# Altium PCB CIU.PcbDoc (part 1 of 2)
Units mil, origin at the board's own origin, x right, y up, seen from the top; angles counter-clockwise.
Board outline 2900 x 1900 mil, 4 copper layers (Layer 1 Signal Power, Layer 2 GND, Layer 3 GND, Layer 4 Signal), stack 23.756 mil thick; 120 components, 69 nets, 401 pads, 201 vias.
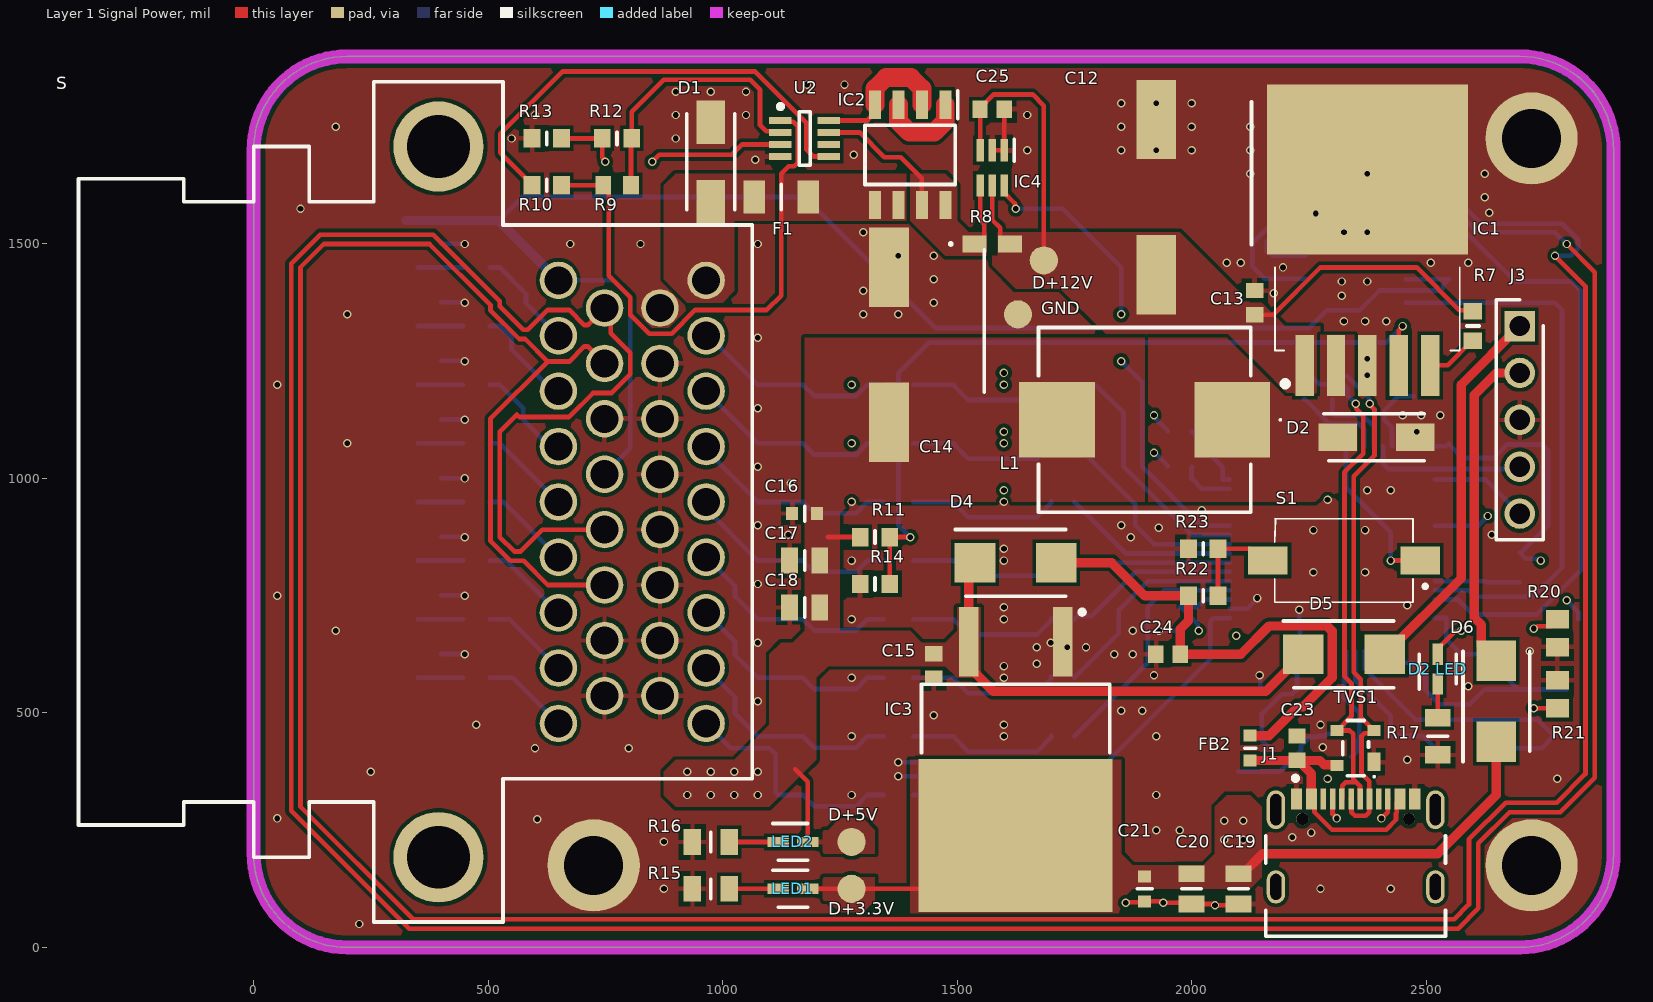
[diagram p0: Layer 1 Signal Power view]
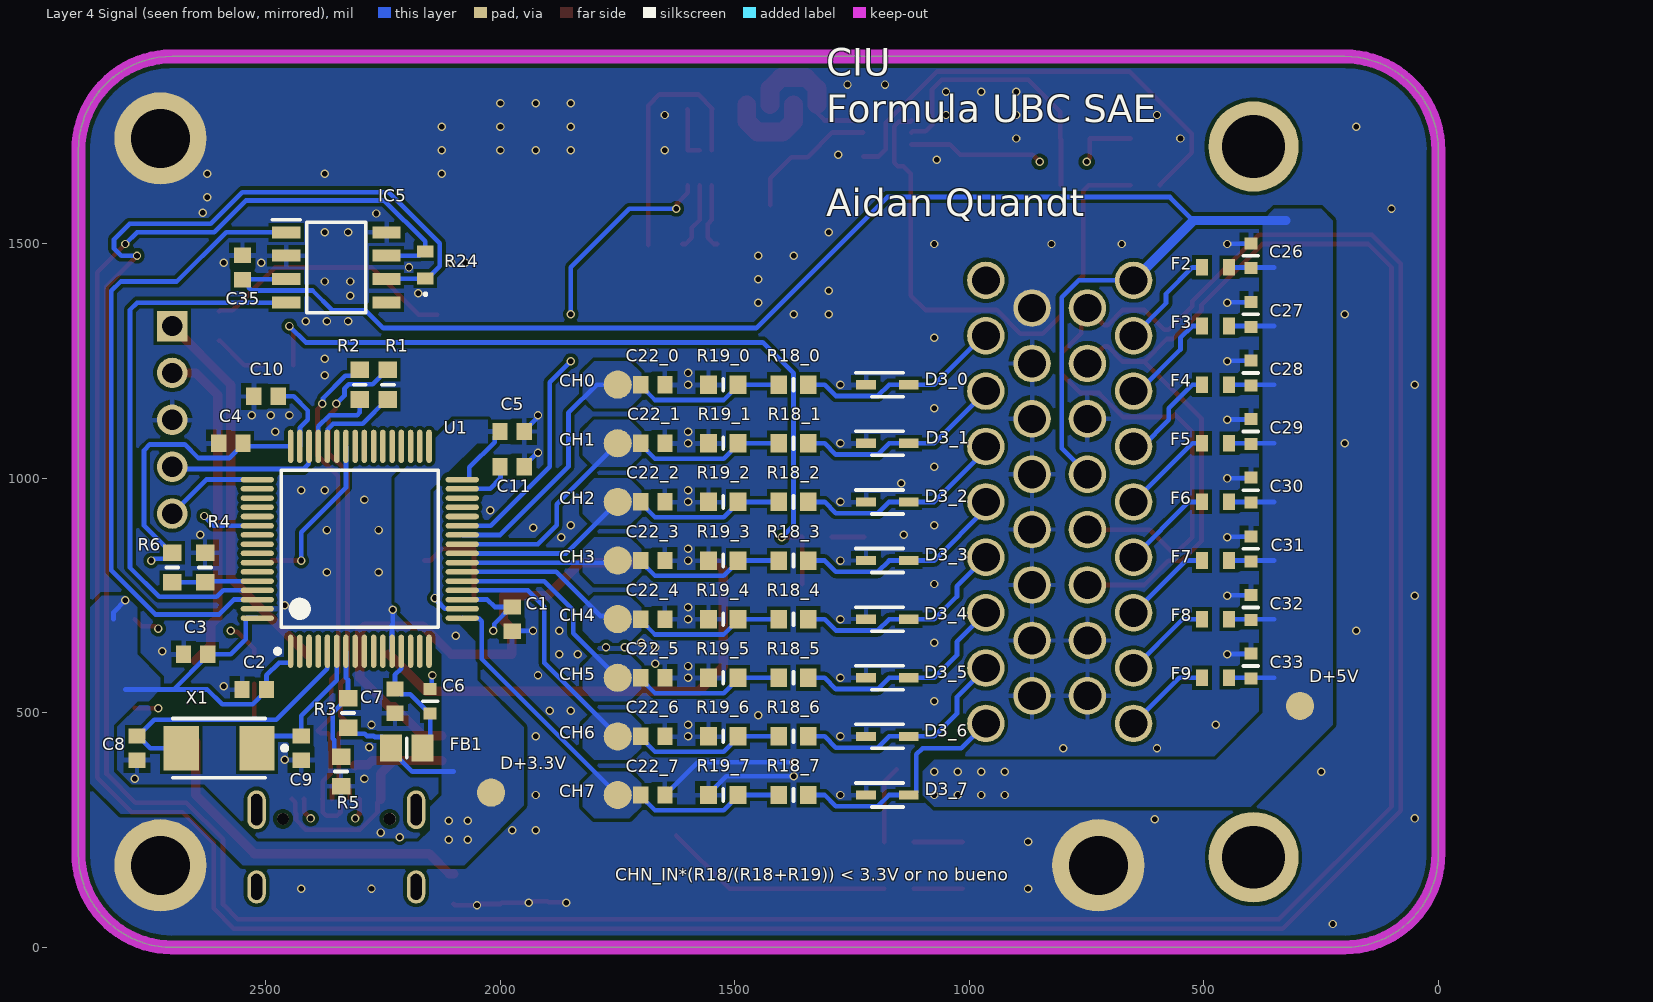
[diagram p1: Layer 4 Signal view, seen from below]
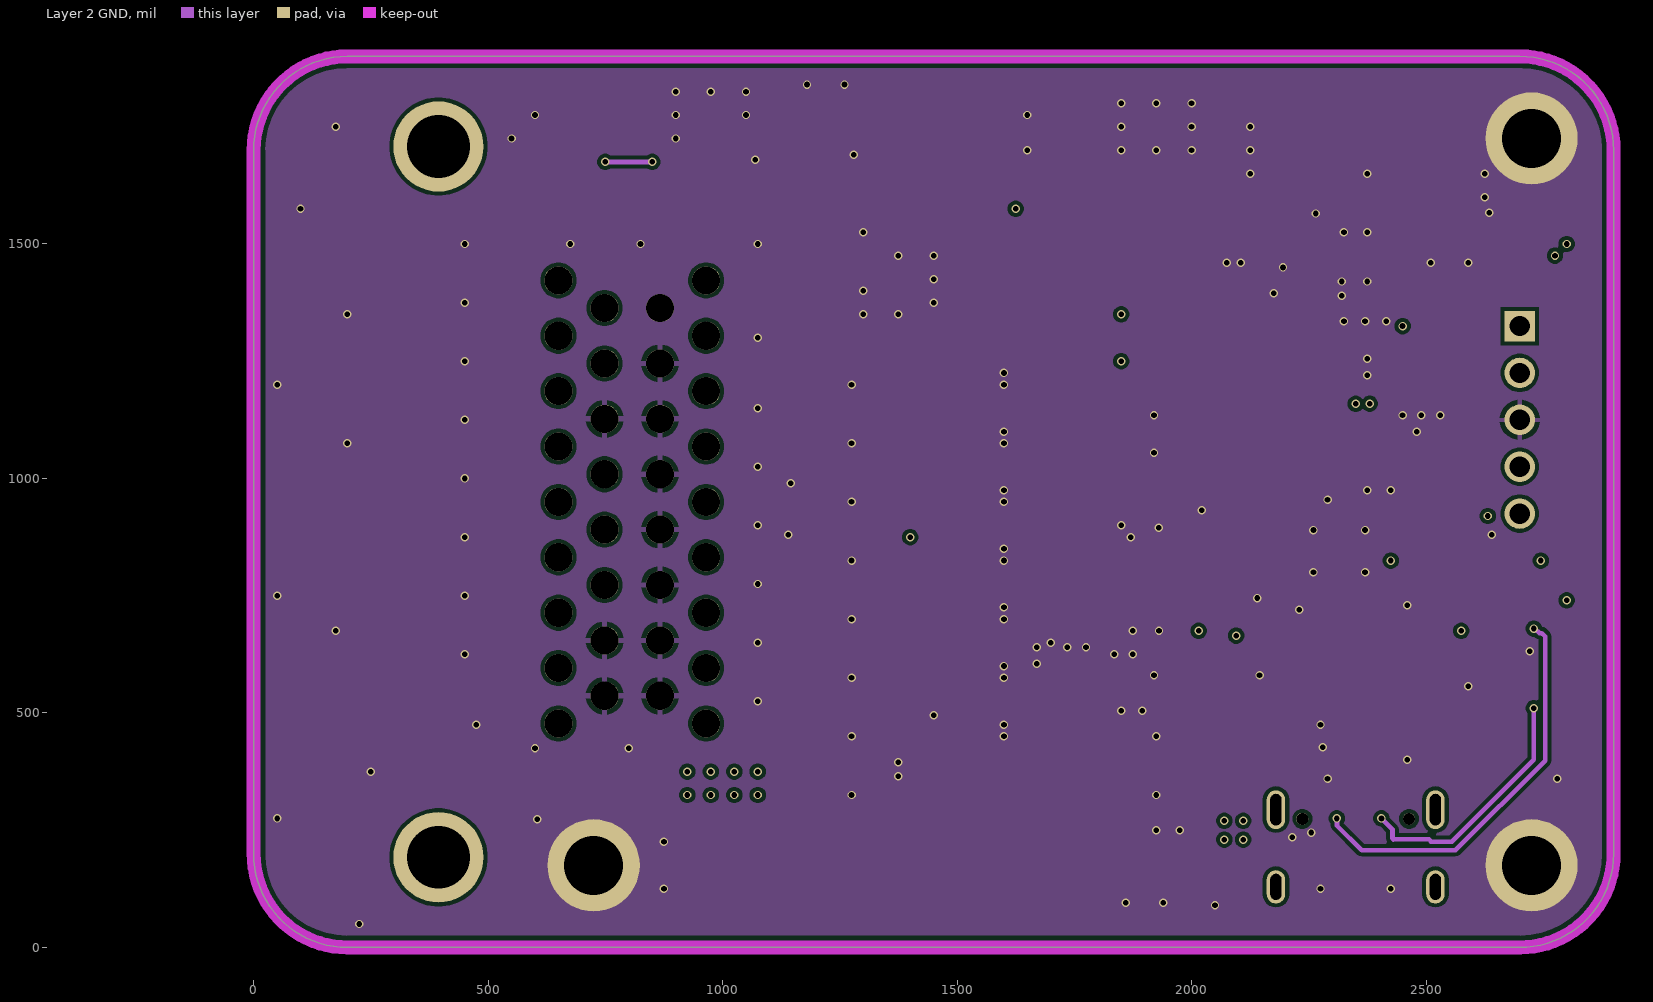
[diagram p2: Layer 2 GND]
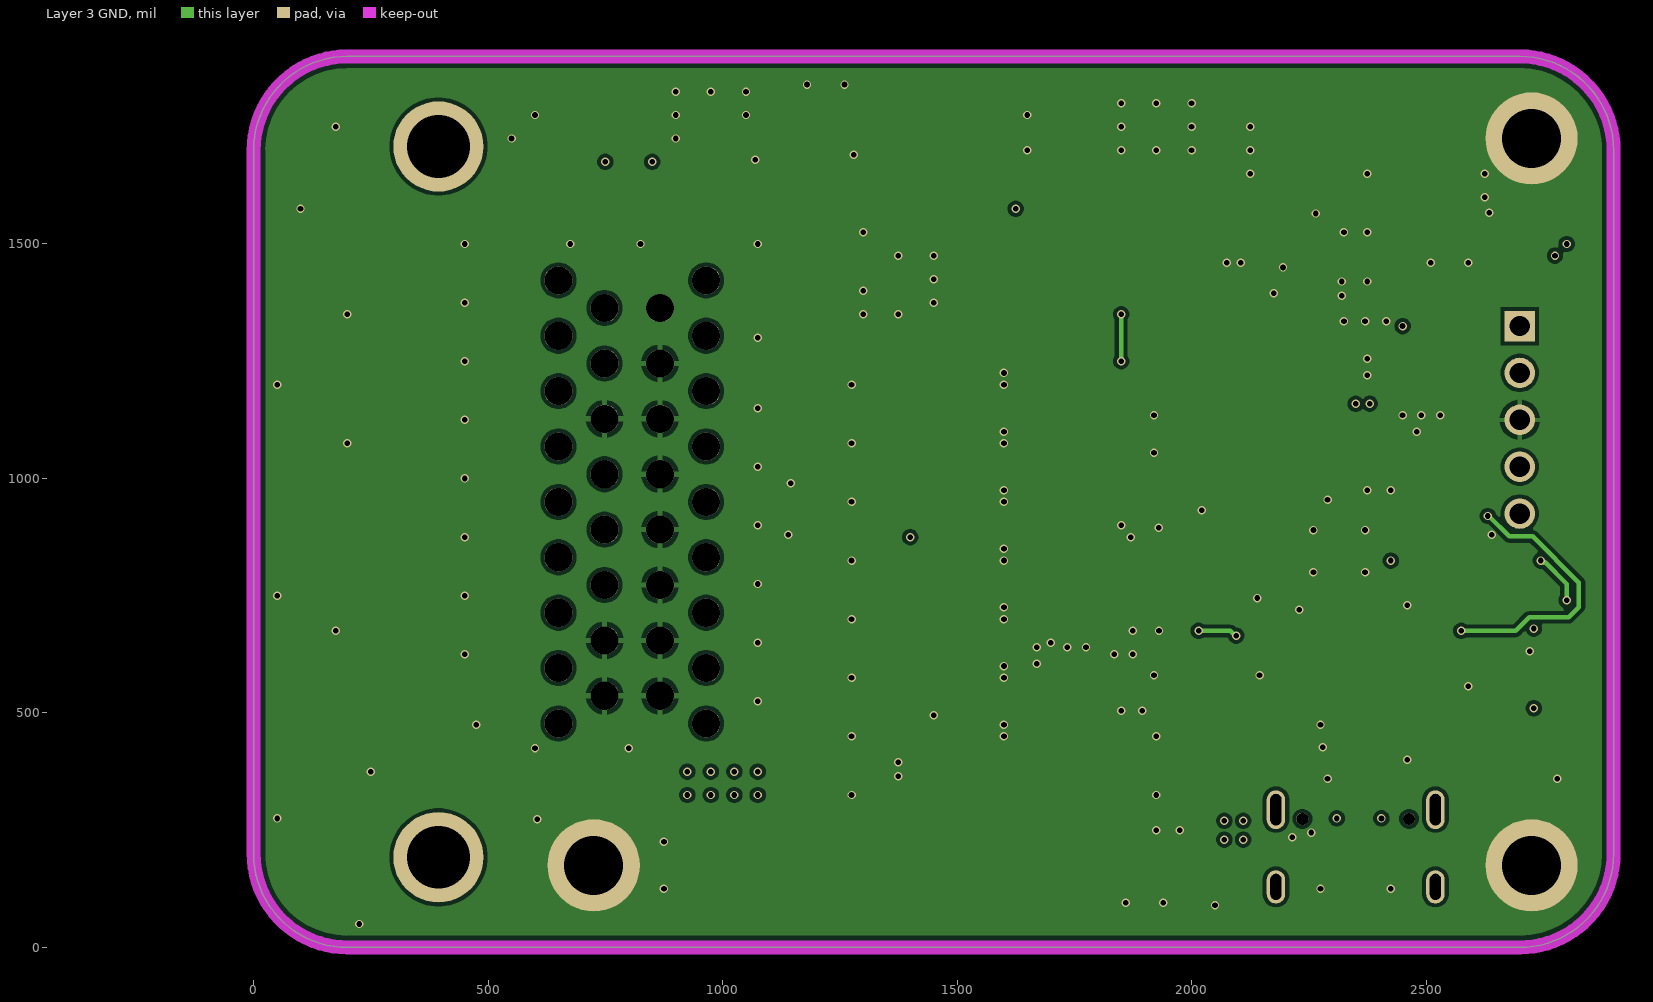
[diagram p3: Layer 3 GND]
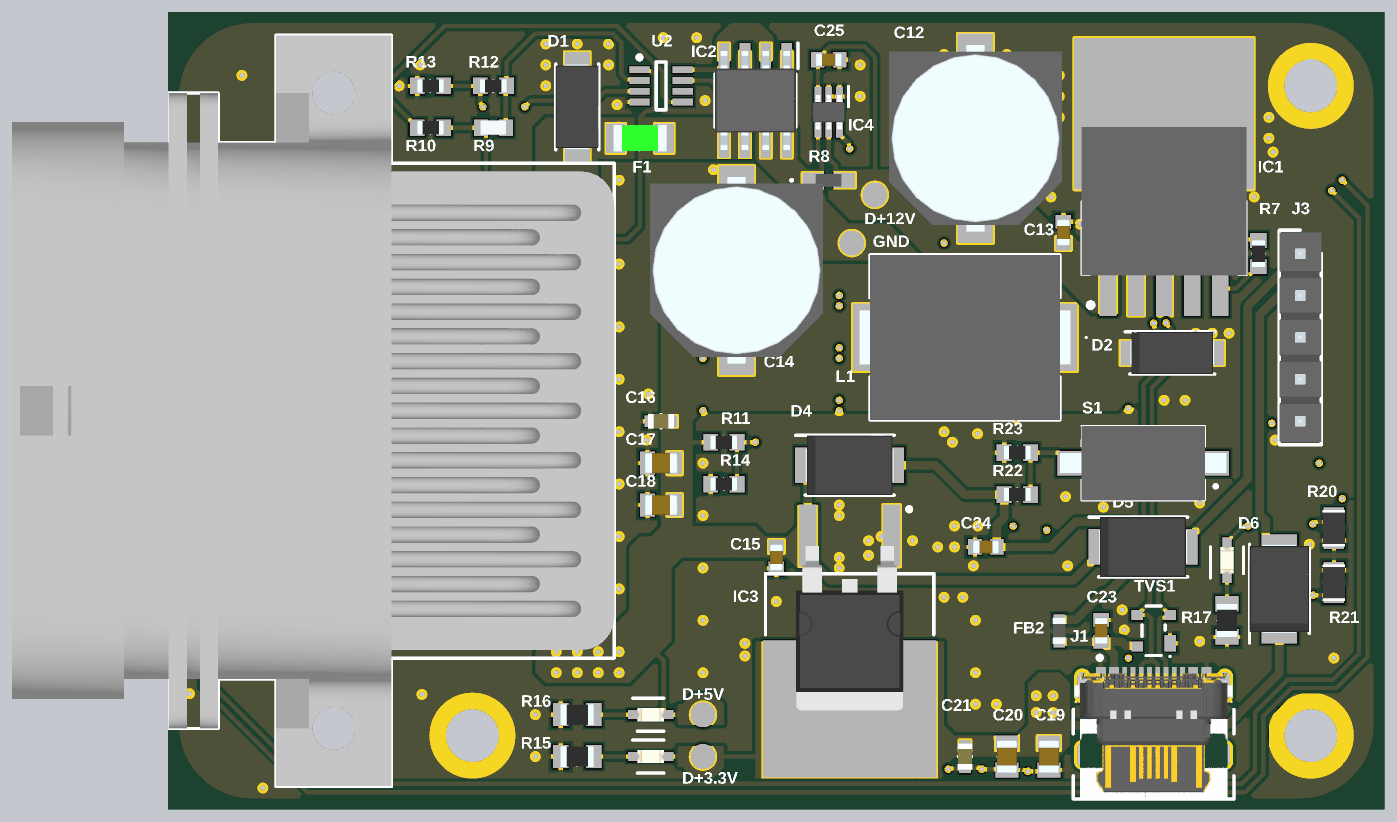
[diagram p5: 3D render of the assembled board from above, using the file's embedded part models]
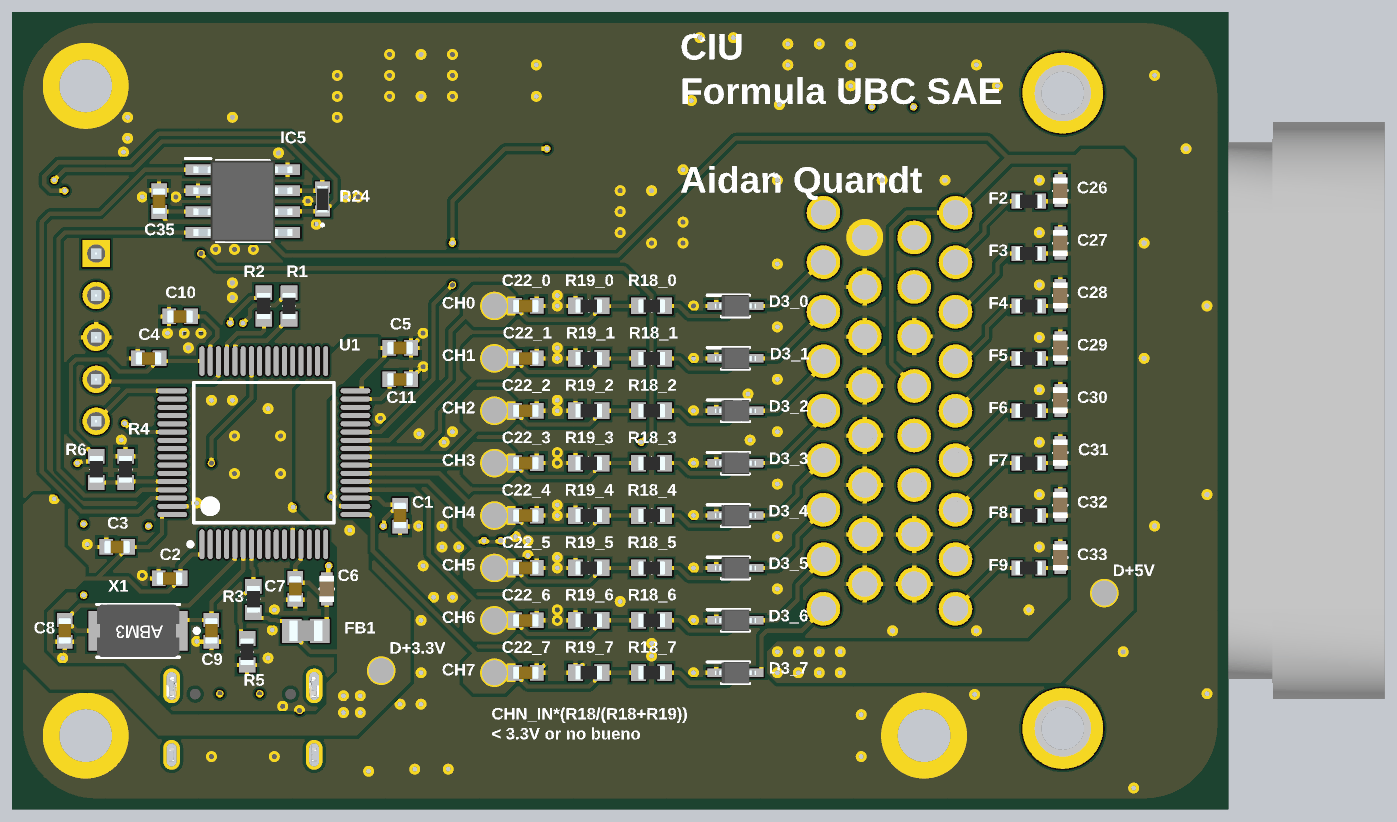
[diagram p6: 3D render of the assembled board from below, using the file's embedded part models]

## Layer stack, top to bottom
Top Solder: solder mask 0.4, Solder Resist, Dk 3.5
Layer 1 Signal Power: signal copper 1.4
Dielectric 2: prepreg 2.8, PP-006, Dk 4.1
Layer 2 GND: signal copper 1.378
Dielectric 1: dielectric 12.6, FR-4, Dk 4.8
Layer 3 GND: signal copper 1.378
Dielectric 3: prepreg 2.8, PP-006, Dk 4.1
Layer 4 Signal: signal copper 1.4
Bottom Solder: solder mask 0.4, Solder Resist, Dk 3.5

## Board outline
0,200 ccw(c200,200) 200,0 2700,0 ccw(c2700,200) 2900,200 2900,1700 ccw(c2700,1700) 2700,1900 200,1900 ccw(c200,1700) 0,1700

## Design rules (kind name [scope] priority, off if disabled: settings)
AssemblyTestpoint [All] p1: testpointundercomponent=TRUE minsize=40 maxsize=100 preferedsize=60 minholesize=0 maxholesize=40 preferedholesize=32 testpointgrid=1 usegrid=TRUE gridoriginx=5950 gridoriginy=5200 gridtolerance=0.01 allowsidetop=TRUE allowsidebottom=TRUE
Clearance Clearance_1 [(ExistsOnLayer('Layer 2 GND') Or ExistsOnLayer('Layer 3 GND')) vs (ExistsOnLayer('Layer 2 GND') Or ExistsOnLayer('Layer 3 GND'))] p1: gap=8 ignorepadtopadclearanceinfootprint=FALSE except(5: SMDPad-SMDPad; 10: Arc-THPad Arc-Via Track-THPad Track-Via THPad-Text Via-Text; 20: SMDPad-THPad THPad-THPad) sourcerule=36 cellrowname=All cellrowtype=0 cellcolname=All cellcoltype=0 innerlayers=TRUE
Clearance Clearance_2 [(ExistsOnLayer('Layer 1 Signal Power') Or ExistsOnLayer('Layer 4 Signal')) vs (ExistsOnLayer('Layer 1 Signal Power') Or ExistsOnLayer('Layer 4 Signal'))] p2: gap=8 ignorepadtopadclearanceinfootprint=FALSE except(5: SMDPad-SMDPad; 10: Arc-THPad Arc-Via Track-THPad Track-Via THPad-Text Via-Text; 20: SMDPad-THPad THPad-THPad) sourcerule=36 cellrowname=All cellrowtype=0 cellcolname=All cellcoltype=0 outerlayers=TRUE
Clearance [All] p3: gap=10 ignorepadtopadclearanceinfootprint=FALSE ismatrix=TRUE
FabricationTestpoint [All] p1: side=3 testpointundercomponent=TRUE minsize=40 maxsize=100 preferedsize=60 minholesize=0 maxholesize=40 preferedholesize=32 testpointgrid=1 allowsidetop=TRUE allowsidebottom=TRUE usegrid=TRUE gridoriginx=5950 gridoriginy=5200 gridtolerance=0.01
Height [All] p1: minheight=0 maxheight=100000 prefheight=500
MinimumSolderMaskSliver [All] p1: minsoldermaskwidth=4.5
PolygonConnect [All] p1: connectstyle=Relief reliefconductorwidth=10 reliefentries=4 polygonreliefangle="90 Angle" airgapwidth=10
RoutingVias [All] p1: holewidth=8 width=18 viastyle="Through Hole" minholewidth=8 minwidth=18 maxholewidth=28 maxwidth=50
SilkToSilkClearance [All] p1: silktosilkclearance=8
SilkToSolderMaskClearance [IsPad] p1: minsilkscreentomaskgap=8 clearancetoexposedcopper=TRUE
SolderMaskExpansion [All] p1: expansion=4 istentingtop=FALSE
Width [All] p1: maxlimit=40 minlimit=10 preferedwidth=10 minimp=50.000000 maximp=50.000000 favimp=50.000000
24 further rules are at their usual default settings.

## Classes and differential pairs
component class Supply: C12 C13 C14 C15 C16 C17 C18 C19 C20 C21 D1 D2 F1 IC1 IC2 L1 LED1 LED2 R7 R8 R9 R10 R11 R12 R13 R14 R15 R16 tga U2
component class STlink: D5 D6 J3
component class "Large Connector": C26 C27 C28 C29 C30 C31 C32 C33 F2 F3 F4 F5 F6 F7 F8 F9 S
component class Designator: C25 IC4
component class Can_Interface: C35 IC5 R24
component class 7: C22_7 D3_7 R18_7 R19_7
component class 6: C22_6 D3_6 R18_6 R19_6
component class 5: C22_5 D3_5 R18_5 R19_5
component class 4: C22_4 D3_4 R18_4 R19_4
component class 3: C22_3 D3_3 R18_3 R19_3
component class 2: C22_2 D3_2 R18_2 R19_2
component class 1: C22_1 D3_1 R18_1 R19_1
component class 0: C22_0 D3_0 R18_0 R19_0
channel class input_conditioner: 0 1 2 3 4 5 6 7
component class MCU: C1 C2 C3 C4 C5 C6 C7 C8 C9 C10 C11 "D2 LED" FB1 R1 R2 R3 R4 R5 R6 R17 U1 X1
component class USB: C23 C24 D4 FB2 J1 R20 R21 R22 R23 S1 TVS1

## Components (designator, comment, footprint, x,y, rotation, side; value= is the part's Value field where it differs from the comment)
C1 "1u" CAPC1608X90N 1975,700 r90 bottom
C2 "1u" CAPC1608X90N 2525,550 r180 bottom
C3 "1u" CAPC1608X90N 2650,625 r180 bottom
C4 "1u" CAPC1608X90N 2575,1075 r180 bottom
C5 "1u" CAPC1608X90N 1975,1100 r0 bottom
C6 "10u" GRM18x 2150,525 r270 bottom
C7 "1u" CAPC1608X90N 2225,525 r90 bottom
C8 "8p" CAPC1608X90N 2775,425 r270 bottom
C9 "8p" CAPC1608X90N 2425,425 r270 bottom
C10 "2u2" CAPC1608X90N 2500,1175 r180 bottom
C11 "2u2" CAPC1608X90N 1975,1025 r0 bottom
C12 "470u" CAPAE1030X1080N 1925,1600 r90 top
C13 "0.1u" CAPC1608X90N 2135,1375 r270 top
C14 "470u" CAPAE1030X1080N 1355,1285 r90 top
C15 "0.1u" CAPC1608X90N 1450,600 r90 top
C16 "10u" GRM18x 1175,925 r0 top
C17 "22u" CAPC2012X95N 1175,825 r0 top
C18 "22u" CAPC2012X95N 1175,725 r0 top
C19 "22u" CAPC2012X95N 2100,125 r90 top
C20 "22u" CAPC2012X95N 2000,125 r90 top
C21 "10u" GRM18x 1900,125 r90 top
C22_0 "DNP" CAPC1608X90N 1675,1200 r0 bottom (schematic designator C22)
C22_1 "DNP" CAPC1608X90N 1675,1075 r0 bottom (schematic designator C22)
C22_2 "DNP" CAPC1608X90N 1675,950 r0 bottom (schematic designator C22)
C22_3 "DNP" CAPC1608X90N 1675,825 r0 bottom (schematic designator C22)
C22_4 "DNP" CAPC1608X90N 1675,700 r0 bottom (schematic designator C22)
C22_5 "DNP" CAPC1608X90N 1675,575 r0 bottom (schematic designator C22)
C22_6 "DNP" CAPC1608X90N 1675,450 r0 bottom (schematic designator C22)
C22_7 "DNP" CAPC1608X90N 1675,325 r0 bottom (schematic designator C22)
C23 "2u2" CAPC1608X90N 2225,425 r270 top
C24 "2u2" CAPC1608X90N 1950,625 r0 top
C25 "0.1u" CAPC1608X90N 1575,1787.4 r180 top
C26 "10u" GRM18x 400,1475 r270 bottom
C27 "10u" GRM18x 400,1350 r270 bottom
C28 "10u" GRM18x 400,1225 r270 bottom
C29 "10u" GRM18x 400,1100 r270 bottom
C30 "10u" GRM18x 400,975 r270 bottom
C31 "10u" GRM18x 400,850 r270 bottom
C32 "10u" GRM18x 400,725 r270 bottom
C33 "10u" GRM18x 400,600 r270 bottom
C35 "0.1u" CAPC1608X90N 2550,1450 r90 bottom
D1 "16V 26V" DIONM5226X240N 975,1675 r270 top
D2 "TSSA3U45" DIOM5126X250N 2394.49,1087.86 r0 top
"D2 LED" "SML-D12P8WT86C" LEDM1620X150N 2525,593.5 r90 top (schematic designator LED3)
D3_0 "DESD5V0U1BA-7" SOD2513X120N 1175,1200 r180 bottom (schematic designator D3)
D3_1 "DESD5V0U1BA-7" SOD2513X120N 1175,1075 r180 bottom (schematic designator D3)
D3_2 "DESD5V0U1BA-7" SOD2513X120N 1175,950 r180 bottom (schematic designator D3)
D3_3 "DESD5V0U1BA-7" SOD2513X120N 1175,825 r180 bottom (schematic designator D3)
D3_4 "DESD5V0U1BA-7" SOD2513X120N 1175,700 r180 bottom (schematic designator D3)
D3_5 "DESD5V0U1BA-7" SOD2513X120N 1175,575 r180 bottom (schematic designator D3)
D3_6 "DESD5V0U1BA-7" SOD2513X120N 1175,450 r180 bottom (schematic designator D3)
D3_7 "DESD5V0U1BA-7" SOD2513X120N 1175,325 r180 bottom (schematic designator D3)
D4 "0.22 V 1A" DIOM5436X330N 1625,820 r0 top
D5 "0.22 V 1A" DIOM5436X330N 2325,625 r0 top
D6 "0.22 V 1A" DIOM5436X330N 2650,525 r90 top
F1 "3A" FUSC3216X83N 1125,1600 r180 top
F2 "1A" ERBRE0R50V 475,1450 r0 bottom
F3 "1A" ERBRE0R50V 475,1325 r0 bottom
F4 "1A" ERBRE0R50V 475,1200 r0 bottom
F5 "1A" ERBRE0R50V 475,1075 r0 bottom
F6 "1A" ERBRE0R50V 475,950 r0 bottom
F7 "1A" ERBRE0R50V 475,825 r0 bottom
F8 "1A" ERBRE0R50V 475,700 r0 bottom
F9 "1A" ERBRE0R50V 475,575 r0 bottom
FB1 "ferrite bead 0805" BEADC2012X105N 2200,425 r0 bottom
FB2 "BLM18KG121TN1D" BLM18EG101TH1D 2125,425 r90 top
IC1 "5V" TS2596CM550RNG 2375,1450 r0 top
IC2 "SI4214DDY-T1-GE3" SOIC127P600X175-8N 1400,1690 r270 top
IC3 "3.3V" TO254P1542X460-3N 1625,400 r270 top
IC4 "INA214AIDCKR" SOT65P210X110-6N 1575,1662.4 r270 top
IC5 "ATA6560-GAQW-N" SOIC127P600X175-8N 2350,1450 r180 bottom
J1 "USB4105-GF-A" FP-USB4105-GF-A-MFG 2350,175 r0 top
J3 "61300511121" HDRV5W64P0X254_1X5_1270X254X854P 2700,1325 r270 top
L1 "47u" 104CDMCCDS470MC 1900,1125 r180 top
LED1 "SML-D12P8WT86C" LEDM1620X150N 1150,125 r0 top
LED2 "SML-D12P8WT86C" LEDM1620X150N 1150,225 r0 top
R1 "22" RESC1608X55N 2240,1200 r270 bottom
R2 "22" RESC1608X55N 2300,1200 r270 bottom
R3 "10k" RESC1608X55N 2325,500 r270 bottom
R4 "10k" RESC1608X55N 2630,810 r90 bottom
R5 "0" RESC1608X55N 2340,375 r90 bottom
R6 "0" RESC1608X55N 2700,810 r270 bottom
R7 "10k" RESC1608X55N 2600,1325 r270 top
R8 "0.01" CSS0603FT10L0 1575,1500 r0 top
R9 "2.74M" RESC1608X50N 775,1625 r180 top
R10 "510k" RESC1608X55N 625,1625 r0 top
R11 "4.7k" RESC1608X55N 1325,875 r180 top
R12 "215k" RESC1608X55N 775,1725 r0 top
R13 "84.5k" RESC1608X55N 625,1725 r0 top
R14 "1.5k" RESC1608X55N 1325,775 r0 top
R15 "56" RESC2012X60N 975,125 r0 top
R16 "140" RESC2012X60N 975,225 r0 top
R17 "56" RESC2012X60N 2525,450 r90 top
R18_0 "340" RESC1608X55N 1375,1200 r180 bottom (schematic designator R18)
R18_1 "340" RESC1608X55N 1375,1075 r180 bottom (schematic designator R18)
R18_2 "340" RESC1608X55N 1375,950 r180 bottom (schematic designator R18)
R18_3 "340" RESC1608X55N 1375,825 r180 bottom (schematic designator R18)
R18_4 "340" RESC1608X55N 1375,700 r180 bottom (schematic designator R18)
R18_5 "340" RESC1608X55N 1375,575 r180 bottom (schematic designator R18)
R18_6 "340" RESC1608X55N 1375,450 r180 bottom (schematic designator R18)
R18_7 "340" RESC1608X55N 1375,325 r180 bottom (schematic designator R18)
R19_0 "665" RESC1608X55N 1525,1200 r180 bottom (schematic designator R19)
R19_1 "665" RESC1608X55N 1525,1075 r180 bottom (schematic designator R19)
R19_2 "665" RESC1608X55N 1525,950 r180 bottom (schematic designator R19)
R19_3 "665" RESC1608X55N 1525,825 r180 bottom (schematic designator R19)
R19_4 "665" RESC1608X55N 1525,700 r180 bottom (schematic designator R19)
R19_5 "665" RESC1608X55N 1525,575 r180 bottom (schematic designator R19)
R19_6 "665" RESC1608X55N 1525,450 r180 bottom (schematic designator R19)
R19_7 "665" RESC1608X55N 1525,325 r180 bottom (schematic designator R19)
R20 "ERA-6AEB103V" RESC2013X60X40LL20T25_A 2780,670 r90 top
R21 "ERA-6AEB103V" RESC2013X60X40LL20T25_A 2780,540 r270 top
R22 "4.7k" RESC1608X55N 2025,750 r180 top
R23 "10k" RESC1608X55N 2025,850 r180 top
R24 "60.4" ERJP03_PA3_(0603) 2160,1455 r90 bottom
S "6437288-1" 6437288-1 1063.39,950 r270 top locked (schematic designator J2)
S1 "SDA01H1SBD" SDA01H1SBD 2325,825 r90 top
TVS1 "PRTR5V0U2X,215" NXP-SOT143B-4_V 2350,425 r180 top
U1 "STM32F405RGT7" STM-LQFP64_N 2300,850 r90 bottom
U2 "LTC4365ITS8#TRMPBF" LT-TS8-8-TSOT-23_V 1175,1725 r0 top
X1 "8 MHz" ABRA-ABM3-2_V 2600,425 r0 bottom

## Footprints (in the part's own frame and the unit in brackets; to place one, negate y for a bottom-side part, rotate by r counter-clockwise, add the part's x,y. Pads: shape width x height; smd on the part's side, far side on the other; paste and mask are expansions set on the pad)
104CDMCCDS470MC [mm]
  rect 4.1x4.1 smd: 1(-4.75,0) 2(4.75,0)
  silkscreen extent -7.4,-5 5.75,5, body extent -6.39,-5 6.39,5, height 4.1
6437288-1 [mil]
  round 80 / inner round 60 / far side round 80 hole 60: 1(-472.44,-98.43) 2(-354.33,-98.43) 3(-236.22,-98.43) 4(-118.11,-98.43) 5(0,-98.43) 6(118.11,-98.43) 7(236.22,-98.43) 8(354.33,-98.43) 9(472.44,-98.43) 10(-413.39,-196.85) 11(-295.28,-196.85) 12(-177.17,-196.85) 13(-59.06,-196.85) 14(59.06,-196.85) 15(177.17,-196.85) 16(295.28,-196.85) 17(413.39,-196.85) 18(-413.39,-314.96) 19(-295.28,-314.96) 20(-177.17,-314.96) 21(-59.06,-314.96) 22(59.06,-314.96) 23(177.17,-314.96) 24(295.28,-314.96) 25(413.39,-314.96) 26(-472.44,-413.39) 27(-354.33,-413.39) 28(-236.22,-413.39) 29(-118.11,-413.39) 30(0,-413.39) 31(118.11,-413.39) 32(236.22,-413.39) 33(354.33,-413.39) 34(472.44,-413.39)
  round 192.52 hole 133.86: 35(757.87,-669.29) 36(-757.87,-669.29)
  silkscreen extent -896,-1437 896,0, body extent -896,-1437 896,0, height 1109
ABRA-ABM3-2_V [mm] "SMD, 2-Leads, Body 5x3.2mm, Pitch 4.1mm"
  rect 1.9x2.4 smd: 1(-2.05,0) 2(2.05,0)
  silkscreen extent -3.67,-1.6 2.5,1.6, body extent -2.5,-1.6 2.5,1.6, height 1.3
BEADC2012X105N [mm]
  rect 1.2x1.45 smd: 1(-0.85,0) 2(0.85,0)
  silkscreen extent 0,-0.53 0,0.53, body extent -1,-0.63 1,0.63, height 1.05
BLM18EG101TH1D [mm]
  rect 0.65x0.7 smd: 1(-0.675,0) 2(0.675,0)
  silkscreen extent 0,-0.3 0,0.3, body extent -0.8,-0.4 0.8,0.4, height 0.6
CAPAE1030X1080N [mm]
  rect 4.3x2.15 smd: 1(-4.2,0) 2(4.2,0)
  silkscreen extent -2.58,-5.15 5.15,-5.15, body extent -5.65,-5.25 5.65,5.25, height 10.8
CAPC1608X90N [mm]
  rect 0.83x0.94 smd: 1(-0.66,0) 2(0.66,0)
  body extent -0.8,-0.4 0.8,0.4, height 0.9
CAPC2012X95N [mm]
  rect 0.91x1.39 smd: 1(-0.82,0) 2(0.82,0)
  silkscreen extent 0,-0.53 0,0.53, body extent -1,-0.63 1,0.63, height 0.95
CSS0603FT10L0 [mm]
  rect 1.3x0.92 smd: 1(-0.95,0) 2(0.95,0)
  silkscreen extent -2.3,-0.05 -2.2,0.05, body extent -0.8,-0.4 0.8,0.4, height 0.25
DIOM5126X250N [mm]
  rect 2.1x1.5 smd: 1(-2.1,0) 2(2.1,0)
  silkscreen extent -2.85,-1.28 2.57,1.28, body extent -2.57,-1.28 2.57,1.28, height 2.5
DIOM5436X330N [mm]
  rect 2.2x2.15 smd: 1(-2.2,0) 2(2.2,0)
  silkscreen extent -3.27,-1.81 2.7,1.81, body extent -2.7,-1.81 2.7,1.81, height 3.3
DIONM5226X240N [mm]
  rect 2.35x1.55 smd: 1(-2.15,0) 2(2.15,0)
  silkscreen extent -2.6,-1.3 2.6,1.3, body extent -2.6,-1.3 2.6,1.3, height 2.4
ERBRE0R50V [mm]
  rect 0.65x0.9 smd: 1(-0.725,0) 2(0.725,0)
  body extent -0.8,-0.4 0.8,0.4, height 0.64
ERJP03_PA3_(0603) [mm]
  rect 0.65x0.9 smd: 1(-0.725,0) 2(0.725,0)
  silkscreen extent -1.62,-0.05 -1.53,0.05, body extent -0.8,-0.4 0.8,0.4, height 0.45
FP-USB4105-GF-A-MFG [mm]
  rrect100% 1x2.1 hole 1.7 slot 0.6 at 0 deg paste-2539.97 mask+0: 1(-4.32,3.015) 2(4.32,3.015)
  rrect100% 1x1.8 hole 1.4 slot 0.6 at 0 deg paste-2539.97 mask+0: 3(-4.32,-1.165) 4(4.32,-1.165)
  rect 0.6x1.15 smd paste+0 mask+0: A1-B12(-3.2,3.59) A4-B9(-2.4,3.59) B1-A12(3.2,3.59) B4-A9(2.4,3.59)
  rect 0.3x1.15 smd paste+0 mask+0: A5(-1.25,3.59) A6(-0.25,3.59) A7(0.25,3.59) A8(1.25,3.59) B5(1.75,3.59) B6(0.75,3.59) B7(-0.75,3.59) B8(-1.75,3.59)
  round 0.65 hole 0.65 unplated paste-2539.97 mask+0: ""(-2.89,2.515) ""(2.89,2.515)
  silkscreen extent -4.86,-3.84 4.86,4.84, body extent -4.96,-3.94 4.96,4.27, height 0.25
FUSC3216X83N [mm]
  rect 1.17x1.8 smd: 1(-1.47,0) 2(1.47,0)
  silkscreen extent 0,-0.69 0,0.69, body extent -1.6,-0.79 1.6,0.79, height 0.83
GRM18x [mm]
  rect 0.65x0.7 smd: 1(-0.675,0) 2(0.675,0)
  silkscreen extent 0,-0.4 0,0.4, body extent -0.8,-0.45 0.8,0.45, height 0.8
HDRV5W64P0X254_1X5_1270X254X854P [mm]
  rect 1.65x1.65 hole 1.1: 1(0,0)
  round 1.65 hole 1.1: 2(2.54,0) 3(5.08,0) 4(7.62,0) 5(10.16,0)
  silkscreen extent -1.42,-1.27 11.58,1.27, body extent -1.27,-1.27 11.43,1.27, height 8.54
LEDM1620X150N [mm]
  rect 1.15x0.55 smd: 1(-0.8,0) 2(0.8,0)
  silkscreen extent -1.07,-1 0.8,1, body extent -0.8,-0.4 0.8,0.4, height 0.55
LT-TS8-8-TSOT-23_V [mm] "SOT23, 8-Leads, Body 2.9x1.75mm, Pitch 0.65mm"
  rect 1.22x0.4 smd: 1(-1.31,0.975) 2(-1.31,0.325) 3(-1.31,-0.325) 4(-1.31,-0.975) 5(1.31,-0.975) 6(1.31,-0.325) 7(1.31,0.325) 8(1.31,0.975)
  silkscreen extent -1.43,-1.45 0.3,1.85, body extent -0.87,-1.45 0.88,1.45, height 1
NXP-SOT143B-4_V [mm] "SOT143, 4-Leads, Body 3x1.4mm"
  rect 0.7x1 smd: 1(-1,0.75)
  rect 0.7x0.6 smd: 2(-1,-0.95) 3(1,-0.95) 4(1,0.95)
  silkscreen extent -1.05,-1.5 0.7,1.6, body extent -0.7,-1.5 0.7,1.5, height 1.1
RESC1608X50N [mm]
  rect 0.85x1 smd: 1(-0.75,0) 2(0.75,0)
  body extent -0.77,-0.43 0.78,0.42, height 0.45
RESC1608X55N [mm]
  rect 0.9x1 smd: 1(-0.8,0) 2(0.8,0)
  silkscreen extent 0,-0.33 0,0.33, body extent -0.8,-0.4 0.8,0.4, height 0.45
RESC2012X60N [mm]
  rect 0.95x1.4 smd: 1(-1,0) 2(1,0)
  silkscreen extent 0,-0.53 0,0.53, body extent -1,-0.63 1,0.63, height 0.6
RESC2013X60X40LL20T25_A [mm] "Chip Resistor, 2-Leads, Body 2.20x1.35mm, IPC High Density"
  rect 1x1.25 smd: 1(-0.75,0) 2(0.75,0)
  body extent -1.1,-0.67 1.1,0.67, height 0.6
SDA01H1SBD [mm]
  rect 1.5x2.15 smd: 1(0,-4.125) 2(0,4.125)
  silkscreen extent -2.26,-4.5 2.26,3.74, body extent -2.26,-5.05 2.26,5.05, height 5.55
SOD2513X120N [mm]
  rect 1.075x0.5 smd: 1(-1.162,0) 2(1.162,0)
  silkscreen extent -1.7,-0.65 0.85,0.65, body extent -1.25,-0.65 1.25,0.65, height 1.2
SOIC127P600X175-8N [mm]
  rect 1.525x0.65 smd: 1(-2.712,1.905) 2(-2.712,0.635) 3(-2.712,-0.635) 4(-2.712,-1.905) 5(2.712,-1.905) 6(2.712,-0.635) 7(2.712,0.635) 8(2.712,1.905)
  silkscreen extent -3.47,-2.45 1.6,2.58, body extent -3,-2.45 3,2.45, height 1.75
SOT65P210X110-6N [mm]
  rect 1.2x0.4 smd: 1(-0.95,0.65) 2(-0.95,0) 3(-0.95,-0.65) 4(0.95,-0.65) 5(0.95,0) 6(0.95,0.65)
  silkscreen extent -1.55,1.2 -0.35,1.2, body extent -1.05,-1 1.05,1, height 1
STM-LQFP64_N [mm] "Thin QFP, 64-Leads, Body 10x10mm, Pitch 0.5mm, IPC Medium Density"
  oval 1.8x0.3 smd: 1(-5.55,3.75) 2(-5.55,3.25) 3(-5.55,2.75) 4(-5.55,2.25) 5(-5.55,1.75) 6(-5.55,1.25) 7(-5.55,0.75) 8(-5.55,0.25) 9(-5.55,-0.25) 10(-5.55,-0.75) 11(-5.55,-1.25) 12(-5.55,-1.75) 13(-5.55,-2.25) 14(-5.55,-2.75) 15(-5.55,-3.25) 16(-5.55,-3.75) 33(5.55,-3.75) 34(5.55,-3.25) 35(5.55,-2.75) 36(5.55,-2.25) 37(5.55,-1.75) 38(5.55,-1.25) 39(5.55,-0.75) 40(5.55,-0.25) 41(5.55,0.25) 42(5.55,0.75) 43(5.55,1.25) 44(5.55,1.75) 45(5.55,2.25) 46(5.55,2.75) 47(5.55,3.25) 48(5.55,3.75)
  oval 0.3x1.8 smd: 17(-3.75,-5.55) 18(-3.25,-5.55) 19(-2.75,-5.55) 20(-2.25,-5.55) 21(-1.75,-5.55) 22(-1.25,-5.55) 23(-0.75,-5.55) 24(-0.25,-5.55) 25(0.25,-5.55) 26(0.75,-5.55) 27(1.25,-5.55) 28(1.75,-5.55) 29(2.25,-5.55) 30(2.75,-5.55) 31(3.25,-5.55) 32(3.75,-5.55) 49(3.75,5.55) 50(3.25,5.55) 51(2.75,5.55) 52(2.25,5.55) 53(1.75,5.55) 54(1.25,5.55) 55(0.75,5.55) 56(0.25,5.55) 57(-0.25,5.55) 58(-0.75,5.55) 59(-1.25,5.55) 60(-1.75,5.55) 61(-2.25,5.55) 62(-2.75,5.55) 63(-3.25,5.55) 64(-3.75,5.55)
  silkscreen extent -5.67,-4.25 4.25,4.58, body extent -5,-5 5,5, height 1.6
TO254P1542X460-3N [mm]
  rect 3.75x1.05 smd: 1(-6.4,2.54) 3(-6.4,-2.54)
  rect 8.3x10.5 smd: 4(4.1,0)
  silkscreen extent -8.12,-5.1 -0.4,5.1, body extent -5.78,-3.25 4.18,3.25, height 2.43
TS2596CM550RNG [mm]
  rect 1x3.3 smd: 1(-3.4,-5.3) 2(-1.7,-5.3) 3(0,-5.3) 4(1.7,-5.3) 5(3.4,-5.3)
  rect 10.9x9.2 smd: 6(0,5.3)
  silkscreen extent -5,-6.35 5,0, body extent -5,-4.5 5,4.5, height 4.95

## Part data
C1 C2 C3 C4 C5 C7: library part CC0603KRX7R7BB105, "CC0603KRX7R7BB105", Manufacturer_Name=KEMET, Mouser Part Number=603-CC603KRX7R7BB105, Arrow Part Number=CC0603KRX7R7BB105, Arrow Price/Stock=https://www.arrow.com/en/products/cc0603krx7r7bb105/yageo?region=nac, Datasheet Link=http://componentsearchengine.com/Datasheets/1/CC0603KRX7R7BB105.pdf, Manufacturer_Part_Number=CC0603KRX7R7BB105, Mouser Price/Stock=https://www.mouser.co.uk/ProductDetail/YAGEO/CC0603KRX7R7BB105?qs=Z5EW3TBnpq2UUKiQ6CZTSQ%3D%3D
C6 C16 C21 C26 C27 C28 C29 C30 C31 C32 C33: library part GRM188R61A106ME69D, "GRM188R61A106ME69D", Manufacturer_Name="Murata Electronics", Mouser Part Number=81-GRM188R61A106ME9D, Arrow Part Number=GRM188R61A106ME69D, Arrow Price/Stock=https://www.arrow.com/en/products/grm188r61a106me69d/murata-manufacturing?region=nac, Datasheet Link=https://search.murata.co.jp/Ceramy/image/img/A01X/G101/ENG/GRM188R61A106ME69-01A.pdf, Height=0.8mm, Manufacturer_Part_Number=GRM188R61A106ME69D, Mouser Price/Stock=https://www.mouser.co.uk/ProductDetail/Murata-Electronics/GRM188R61A106ME69D?qs=o98hbGm2QKGN31NsNZp5HQ%3D%3D
C8 C9: library part CGA3E2C0G1H080D080AA, "CGA3E2C0G1H080D080AA", Manufacturer_Name=TDK, Mouser Part Number=810-CGA3E2C0G1H080D, Arrow Part Number=CGA3E2C0G1H080D080AA, Arrow Price/Stock=https://www.arrow.com/en/products/cga3e2c0g1h080d080aa/tdk, Datasheet Link=http://docs-europe.electrocomponents.com/webdocs/14e9/0900766b814e9125.pdf, Height=0.9mm, Manufacturer_Part_Number=CGA3E2C0G1H080D080AA, Mouser Price/Stock=https://www.mouser.com/Search/Refine.aspx?Keyword=810-CGA3E2C0G1H080D
C10 C11 C22_0 C22_1 C22_2 C22_3 C22_4 C22_5 C22_6 C22_7 C23 C24: library part CL10B225KP8NNNC, "CL10B225KP8NNNC", Manufacturer_Name=SAMSUNG, Mouser Part Number=187-CL10B225KP8NNNC, Arrow Part Number=CL10B225KP8NNNC, Arrow Price/Stock=https://www.arrow.com/en/products/cl10b225kp8nnnc/samsung-electro-mechanics?region=nac, Datasheet Link=https://datasheet.datasheetarchive.com/originals/distributors/Datasheets-DGA10/2411679.pdf, Height=0.9mm, Manufacturer_Part_Number=CL10B225KP8NNNC, Mouser Price/Stock=https://www.mouser.co.uk/ProductDetail/Samsung-Electro-Mechanics/CL10B225KP8NNNC?qs=X6jEic%2FHinDbk4bW6Red9A%3D%3D
C12 C14: library part UWT1E471MNL1GS, "UWT1E471MNL1GS", Manufacturer_Name=Nichicon, Mouser Part Number=647-UWT1E471MNL1S, Arrow Part Number=UWT1E471MNL1GS, Arrow Price/Stock=https://www.arrow.com/en/products/uwt1e471mnl1gs/nichicon?region=nac, Datasheet Link=http://www.nichicon.co.jp/english/products/pdfs/e-uwt.pdf, Height=10.8mm, Manufacturer_Part_Number=UWT1E471MNL1GS, Mouser Price/Stock=https://www.mouser.co.uk/ProductDetail/Nichicon/UWT1E471MNL1GS?qs=58AOoXU9eaxhCCrDm%2FRamg%3D%3D
C13 C15 C25 C35: library part CC0603KRX7R8BB104, "CC0603KRX7R8BB104", Manufacturer_Name=KEMET, Mouser Part Number=603-CC603KRX7R8BB104, Arrow Part Number=CC0603KRX7R8BB104, Arrow Price/Stock=https://www.arrow.com/en/products/cc0603krx7r8bb104/yageo, Datasheet Link=https://datasheet.datasheetarchive.com/originals/distributors/Datasheets_SAMA/d9f127a4875522309d99aa7dec79633c.pdf, Height=0.9mm, Manufacturer_Part_Number=CC0603KRX7R8BB104, Mouser Price/Stock=https://www.mouser.co.uk/ProductDetail/Yageo/CC0603KRX7R8BB104?qs=AgBp2OyFlx%252B4QOgEm%2Fb3YQ%3D%3D
C17 C18 C19 C20: library part GRM219R61A226MEA0D, "GRM219R61A226MEA0D", Manufacturer_Name="Murata Electronics", Mouser Part Number=81-GRM219R61A226ME0D, Arrow Part Number=GRM219R61A226MEA0D, Arrow Price/Stock=https://www.arrow.com/en/products/grm219r61a226mea0d/murata-manufacturing?region=nac, Datasheet Link=http://www.murata.com/~/media/webrenewal/support/library/catalog/products/capacitor/mlcc/c02e.pdf, Height=0.95mm, Manufacturer_Part_Number=GRM219R61A226MEA0D, Mouser Price/Stock=https://www.mouser.co.uk/ProductDetail/Murata-Electronics/GRM219R61A226MEA0D?qs=eeBpzGFlv%252B9ilUnm7iaG2w%3D%3D
D1: library part SMAJ16CA-13-F, "SMAJ16CA-13-F", Manufacturer_Name="Diodes Incorporated", Mouser Part Number=621-SMAJ16CA-13-F, Arrow Part Number=SMAJ16CA-13-F, Arrow Price/Stock=https://www.arrow.com/en/products/smaj16ca-13-f/diodes-incorporated?region=nac, Datasheet Link=https://www.diodes.com/assets/Datasheets/ds19005.pdf, Height=2.4mm, Manufacturer_Part_Number=SMAJ16CA-13-F, Mouser Price/Stock=https://www.mouser.co.uk/ProductDetail/Diodes-Incorporated/SMAJ16CA-13-F?qs=sxN%252BoM2fis%252Bu4iX3J5Cr7g%3D%3D
D2: "Schottky Diode", Manufacturer_Name="Taiwan Semiconductor", Mouser Part Number=821-TSSA3U45, Height=2.5mm, Manufacturer_Part_Number=TSSA3U45, Mouser Price/Stock=https://www.mouser.co.uk/ProductDetail/Taiwan-Semiconductor/TSSA3U45?qs=9cRNMfhK%252BrST5ZgV9DORjA%3D%3D
"D2 LED" LED1 LED2: "LED", Manufacturer_Name="ROHM Semiconductor", Mouser Part Number=755-SML-D12P8WT86C, Datasheet Link=https://datasheet.datasheetarchive.com/originals/distributors/DKDS-39/8731.pdf, Height=1.5mm, Manufacturer_Part_Number=SML-D12P8WT86C, Mouser Price/Stock=https://www.mouser.co.uk/ProductDetail/ROHM-Semiconductor/SML-D12P8WT86C?qs=HXFqYaX1Q2wFepzn1zWRrg%3D%3D
D3_0 D3_1 D3_2 D3_3 D3_4 D3_5 D3_6 D3_7: "TVS Diode (Bi-directional)", Manufacturer_Name="Diodes Incorporated", Mouser Part Number=621-DESD5V0U1BA-7, Arrow Part Number=DESD5V0U1BA-7, Arrow Price/Stock=https://www.arrow.com/en/products/desd5v0u1ba-7/diodes-incorporated?region=nac, Datasheet Link=https://www.diodes.com//assets/Datasheets/DESD5V0U1BA.pdf, Height=1.2mm, Manufacturer_Part_Number=DESD5V0U1BA-7, Mouser Price/Stock=https://www.mouser.co.uk/ProductDetail/Diodes-Incorporated/DESD5V0U1BA-7?qs=wtVJq%252Be05r98RUWcs2LyvQ%3D%3D
D4 D5 D6: library part LSM115JE3_TR13, "LSM115JE3_TR13", Arrow Part Number=LSM115JE3/TR13, Manufacturer_Name="Microsemi Corporation", Mouser Part Number=494-LSM115JE3/TR13, Arrow Price/Stock=https://www.arrow.com/en/products/lsm115je3tr13/microsemi, Datasheet Link=https://media.digikey.com/pdf/Data%20Sheets/Microsemi%20PDFs/LSM115J.pdf, Height=3.3mm, Manufacturer_Part_Number=LSM115JE3/TR13, Mouser Price/Stock=https://www.mouser.co.uk/ProductDetail/Microchip-Microsemi/LSM115JE3-TR13/?qs=6jAvgNDGUA8H9k1qUsKdHA%3D%3D
F1: library part 0685T3000-01, "0685T3000-01", Manufacturer_Name=BelFuse, Arrow Part Number=0685T3000-01, Arrow Price/Stock=https://www.arrow.com/en/products/0685t3000-01/bel-group, Datasheet Link=https://www.belfuse.com/resources/datasheets/circuitprotection/ds-cp-c1t-series.pdf, Height=0.83mm, Manufacturer_Part_Number=0685T3000-01
F2 F3 F4 F5 F6 F7 F8 F9: library part ERB-RE1R00V, "ERB-RE1R00V", Manufacturer_Name=Panasonic, Mouser Part Number=667-ERB-RE1R00V, Arrow Part Number=ERB-RE1R00V, Arrow Price/Stock=https://www.arrow.com/en/products/erb-re1r00v/panasonic?region=nac, Datasheet Link=https://industrial.panasonic.com/cdbs/www-data/pdf/AFA0000/AFA0000C7.pdf, Height=0.64mm, Manufacturer_Part_Number=ERB-RE1R00V, Mouser Price/Stock=https://www.mouser.co.uk/ProductDetail/Panasonic/ERB-RE1R00V?qs=YIEcsSB2Lz5z%252BYSnyVyHaw%3D%3D
FB1: library part FBMJ2125HS250NT, "FBMJ2125HS250NT", Manufacturer_Name="TAIYO YUDEN", Mouser Part Number=963-FBMJ2125HS250NT, Arrow Part Number=FBMJ2125HS250NT, Arrow Price/Stock=null?region=nac, Datasheet Link=https://mouser.componentsearchengine.com/Datasheets/1/FBMJ2125HS250NT.pdf, Height=1.05mm, Manufacturer_Part_Number=FBMJ2125HS250NT, Mouser Price/Stock=https://www.mouser.co.uk/ProductDetail/TAIYO-YUDEN/FBMJ2125HS250NT?qs=I6KAKw0tg2w%2F7qNkMvc%2FCQ%3D%3D
FB2: "Ferrite Bead", Manufacturer_Name="Murata Electronics", Mouser Part Number=81-BLM18KG121TN1D, Arrow Part Number=BLM18KG121TN1D, Arrow Price/Stock=https://www.arrow.com/en/products/blm18kg121tn1d/murata-manufacturing?region=nac, Datasheet Link=http://www.murata.com/~/media/webrenewal/support/library/catalog/products/emc/emifil/c31e.ashx?la=en-gb, Height=0.75mm, Manufacturer_Part_Number=BLM18KG121TN1D, Mouser Price/Stock=https://www.mouser.co.uk/ProductDetail/Murata-Electronics/BLM18KG121TN1D?qs=rvfpa0%252BU10PYAwVv0fw24Q%3D%3D
IC1: library part TS2596CM550_RNG, "TS2596CM550_RNG", Arrow Part Number="TS2596CM550 RNG", Manufacturer_Name="Taiwan Semiconductor", Mouser Part Number=821-TS2596CM550RNG, Arrow Price/Stock=https://www.arrow.com/en/products/ts2596cm550rng/taiwan-semiconductor?region=europe, Datasheet Link=https://www.taiwansemi.com/products/datasheet/TS2596_G1608.pdf, Height=4.85mm, Manufacturer_Part_Number="TS2596CM550 RNG", Mouser Price/Stock=https://www.mouser.co.uk/ProductDetail/Taiwan-Semiconductor/TS2596CM550-RNG?qs=QEzMiVqgwc1IpOivVc2Ydw%3D%3D
IC2: "Integrated Circuit", Manufacturer_Name=Vishay, Mouser Part Number=781-SI4214DDY-GE3, Arrow Part Number=SI4214DDY-T1-GE3, Arrow Price/Stock=https://www.arrow.com/en/products/si4214ddy-t1-ge3/vishay, Datasheet Link=https://www.vishay.com/docs/65022/si4214ddy.pdf, Height=1.75mm, Manufacturer_Part_Number=SI4214DDY-T1-GE3, Mouser Price/Stock=https://www.mouser.co.uk/ProductDetail/Vishay-Semiconductors/SI4214DDY-T1-GE3?qs=kt16UJ73eEGZKWuc2RKrng%3D%3D
IC3: library part LD1085D2M33R, "LD1085D2M33R", Manufacturer_Name=STMicroelectronics, Mouser Part Number=511-LD1085D2M33-TR, Arrow Part Number=LD1085D2M33R, Arrow Price/Stock=https://www.arrow.com/en/products/ld1085d2m33r/stmicroelectronics?region=nac, Datasheet Link=http://www.st.com/web/en/resource/technical/document/datasheet/CD00001883.pdf, Height=4.6mm, Manufacturer_Part_Number=LD1085D2M33R, Mouser Price/Stock=https://www.mouser.co.uk/ProductDetail/STMicroelectronics/LD1085D2M33R?qs=LWigd6wg%252B9coO4fwnjoeQg%3D%3D
IC4: "Integrated Circuit", Manufacturer_Name="Texas Instruments", Mouser Part Number=595-INA214AIDCKR, Arrow Part Number=INA214AIDCKR, Arrow Price/Stock=https://www.arrow.com/en/products/ina214aidckr/texas-instruments?region=nac, Datasheet Link=https://datasheet.lcsc.com/szlcsc/Texas-Instruments-TI-INA214AIDCKR_C105240.pdf, Height=1.1mm, Manufacturer_Part_Number=INA214AIDCKR, Mouser Price/Stock=https://www.mouser.co.uk/ProductDetail/Texas-Instruments/INA214AIDCKR?qs=wCchVgLzAYyu8hCuRiPIXw%3D%3D
IC5: "Integrated Circuit", Manufacturer_Name=Microchip, Mouser Part Number=579-ATA6560-GAQW-N, Arrow Part Number=ATA6560-GAQW-N, Arrow Price/Stock=https://www.arrow.com/en/products/ata6560-gaqw-n/microchip-technology?region=nac, Datasheet Link=https://mouser.componentsearchengine.com/Datasheets/1/ATA6560-GAQW-N.pdf, Height=1.75mm, Manufacturer_Part_Number=ATA6560-GAQW-N, Mouser Price/Stock=https://www.mouser.co.uk/ProductDetail/Microchip-Technology-Atmel/ATA6560-GAQW-N?qs=y6ZabgHbY%252By0WOzqKXUktg%3D%3D
J1: library part CMP-245163-000001-1, "CONN RCPT USB2.0 TYPEC 5A", Current Rating=5/6.25/1.25/0.25A, Manufacturer=GCT, Package=0, Temperature="-40°C to +85°C", Temperature Range High=+85°C, Temperature Range Low=-40°C, Voltage Rating=20V, Automotive=No, Category=Conn, ComponentLink2Description=Datasheet, ComponentLink2URL=https://gct.co/files/drawings/usb4105.pdf, Conn Orientation="Right Angle", Contact Material=Gold,Nickel, Device Class L1=Connectors, Device Class L2="USB Connectors", Device Class L3=unset, Digikey Description="CONN RCPT USB2.0 TYPEC 5A", Height=3.46mm, Is Female=yes, Lead Free=Yes, Manufacturer Part Number=USB4105-GF-A, Number Of Contacts=16, Octopart=https://octopart.com/usb4105-gf-a-gct-106627878, RoHS=TRUE, Usb Standard="USB 2.0"
J3: "Connector", Manufacturer_Name="Wurth Elektronik", Mouser Part Number=710-61300511121, Datasheet Link=http://katalog.we-online.de/em/datasheet/6130xx11121.pdf, Height=8.54mm, Manufacturer_Part_Number=61300511121, Mouser Price/Stock=https://www.mouser.co.uk/ProductDetail/Wurth-Elektronik/61300511121?qs=PhR8RmCirEZCsCRHq%252BvfRQ%3D%3D
L1: library part 104CDMCCDS-470MC, "104CDMCCDS-470MC", Manufacturer_Name=Sumida, Mouser Part Number=851-104CDMCCDS-470MC, Arrow Part Number=104CDMCCDS-470MC, Arrow Price/Stock=https://www.arrow.com/en/products/104cdmccds-470mc/sumida?region=nac, Datasheet Link=https://products.sumida.com/products/pdf/104CDMCCDS.pdf, Height=4mm, Manufacturer_Part_Number=104CDMCCDS-470MC, Mouser Price/Stock=https://www.mouser.co.uk/ProductDetail/Sumida/104CDMCCDS-470MC?qs=D3efs7kfDkXJMDQiS36zsw%3D%3D
R1 R2: library part RMCF0603JT22R0, "RMCF0603JT22R0", Manufacturer_Name="Stackpole Electronics", Datasheet Link=https://www.seielect.com/Catalog/SEI-RMCF_RMCP.pdf, Height=0.55mm, Manufacturer_Part_Number=RMCF0603JT22R0
R3 R4 R7 R23: library part RC0603FR0710KL, "RC0603FR0710KL", Manufacturer_Name=KEMET, Arrow Part Number=RC0603FR0710KL, Arrow Price/Stock=https://www.arrow.com/en/products/rc0603fr-0710kl/yageo, Datasheet Link=http://www.yageo.com/documents/recent/PYu-RC0603_51_RoHS_L_v5.pdf, Height=0.55mm, Manufacturer_Part_Number=RC0603FR0710KL
R5 R6: library part RC0603JR-070RL, "RC0603JR-070RL", Manufacturer_Name=YAGEO, Mouser Part Number=603-RC0603JR-070RL, Arrow Part Number=RC0603JR-070RL, Arrow Price/Stock=https://www.arrow.com/en/products/rc0603jr-070rl/yageo?region=nac, Datasheet Link=https://componentsearchengine.com/Datasheets/2/RC0603JR-070RL.pdf, Height=0.55mm, Manufacturer_Part_Number=RC0603JR-070RL, Mouser Price/Stock=https://www.mouser.co.uk/ProductDetail/YAGEO/RC0603JR-070RL?qs=2cAdsCoAWRGWyPcuXgGiXQ%3D%3D
R8: library part CSS0603FT10L0, "CSS0603FT10L0", Manufacturer_Name="Stackpole Electronics", Mouser Part Number=708-CSS0603FT10L0, Datasheet Link=https://cs.seielect.com/catalog/SEI-CSS_CSSH.PDF, Height=0.65mm, Manufacturer_Part_Number=CSS0603FT10L0, Mouser Price/Stock=https://www.mouser.co.uk/ProductDetail/SEI-Stackpole/CSS0603FT10L0?qs=IPgv5n7u5QYzRPLHp2eb2A%3D%3D
R9: library part CRCW06032M74FKEA, "CRCW06032M74FKEA", Manufacturer_Name=Vishay, Mouser Part Number=71-CRCW0603-2.74M-E3, Datasheet Link=http://www.vishay.com/docs/20035/dcrcwe3.pdf, Height=0.5mm, Manufacturer_Part_Number=CRCW06032M74FKEA, Mouser Price/Stock=https://www.mouser.co.uk/ProductDetail/Vishay-Dale/CRCW06032M74FKEA?qs=m78yHlr47QCVMroNQkprhA%3D%3D
R10: library part RC0603JR-07510KL, "RC0603JR-07510KL", Manufacturer_Name=YAGEO, Mouser Part Number=603-RC0603JR-07510KL, Arrow Part Number=RC0603JR-07510KL, Arrow Price/Stock=https://www.arrow.com/en/products/rc0603jr-07510kl/yageo?region=nac, Datasheet Link=https://www.yageo.com/upload/media/product/productsearch/datasheet/rchip/PYu-RC_Group_51_RoHS_L_12.pdf, Height=0.55mm, Manufacturer_Part_Number=RC0603JR-07510KL, Mouser Price/Stock=https://www.mouser.co.uk/ProductDetail/YAGEO/RC0603JR-07510KL?qs=KptU%252BSbrlu3yTjO7DJSdzQ%3D%3D
R11 R22: library part RC0603FR-074K7L, "RC0603FR-074K7L", Manufacturer_Name=YAGEO, Mouser Part Number=603-RC0603FR-074K7L, Arrow Part Number=RC0603FR-074K7L, Arrow Price/Stock=https://www.arrow.com/en/products/rc0603fr-074k7l/yageo?region=nac, Datasheet Link=https://componentsearchengine.com/Datasheets/2/RC0603FR-074K7L.pdf, Height=0.55mm, Manufacturer_Part_Number=RC0603FR-074K7L, Mouser Price/Stock=https://www.mouser.co.uk/ProductDetail/YAGEO/RC0603FR-074K7L?qs=gt6vzsuosg37y0l7Vt36bQ%3D%3D
R12: library part ERJ-3EKF2153V, "ERJ-3EKF2153V", Manufacturer_Name=Panasonic, Mouser Part Number=667-ERJ-3EKF2153V, Arrow Part Number=ERJ-3EKF2153V, Arrow Price/Stock=https://www.arrow.com/en/products/erj-3ekf2153v/panasonic, Datasheet Link=http://industrial.panasonic.com/cdbs/www-data/pdf/RDA0000/AOA0000C86.pdf, Height=0.55mm, Manufacturer_Part_Number=ERJ-3EKF2153V, Mouser Price/Stock=https://www.mouser.com/Search/Refine.aspx?Keyword=667-ERJ-3EKF2153V
R13: library part RC0603FR-0784K5L, "RC0603FR-0784K5L", Manufacturer_Name=KEMET, Mouser Part Number=603-RC0603FR-0784K5L, Arrow Part Number=RC0603FR-0784K5L, Arrow Price/Stock=https://www.arrow.com/en/products/rc0603fr-0784k5l/yageo, Datasheet Link=http://www.yageo.com/documents/recent/PYu-RC0603_51_RoHS_L_v5.pdf, Height=0.55mm, Manufacturer_Part_Number=RC0603FR-0784K5L, Mouser Price/Stock=https://www.mouser.com/Search/Refine.aspx?Keyword=603-RC0603FR-0784K5L
R14: library part RC0603FR-071K5L, "RC0603FR-071K5L", Manufacturer_Name=KEMET, Mouser Part Number=603-RC0603FR-071K5L, Arrow Part Number=RC0603FR-071K5L, Arrow Price/Stock=https://www.arrow.com/en/products/rc0603fr-071k5l/yageo?region=nac, Datasheet Link=http://www.yageo.com/documents/recent/PYu-RC0603_51_RoHS_L_v5.pdf, Height=0.55mm, Manufacturer_Part_Number=RC0603FR-071K5L, Mouser Price/Stock=https://www.mouser.co.uk/ProductDetail/YAGEO/RC0603FR-071K5L?qs=VU8sRB4EgwBMt9nc4XGNgA%3D%3D
R15 R17: library part RC0805FR-0756RL, "RC0805FR-0756RL", Manufacturer_Name=KEMET, Mouser Part Number=603-RC0805FR-0756RL, Arrow Part Number=RC0805FR-0756RL, Arrow Price/Stock=https://www.arrow.com/en/products/rc0805fr-0756rl/yageo?region=nac, Datasheet Link=http://www.yageo.com/documents/recent/PYu-RC_Group_51_RoHS_L_10.pdf, Height=0.6mm, Manufacturer_Part_Number=RC0805FR-0756RL, Mouser Price/Stock=https://www.mouser.co.uk/ProductDetail/YAGEO/RC0805FR-0756RL?qs=VLOqbHBAO5ckb16qgp9IuA%3D%3D
R16: library part RC0805FR-07140RL, "RC0805FR-07140RL", Manufacturer_Name=KEMET, Mouser Part Number=603-RC0805FR-07140RL, Arrow Part Number=RC0805FR-07140RL, Arrow Price/Stock=https://www.arrow.com/en/products/rc0805fr-07140rl/yageo?region=nac, Datasheet Link=http://www.yageo.com/documents/recent/PYu-RC_Group_51_RoHS_L_10.pdf, Height=0.6mm, Manufacturer_Part_Number=RC0805FR-07140RL, Mouser Price/Stock=https://www.mouser.co.uk/ProductDetail/YAGEO/RC0805FR-07140RL?qs=8Y8p%252BasKcI7sqDTj5iJQmA%3D%3D
R18_0 R18_1 R18_2 R18_3 R18_4 R18_5 R18_6 R18_7: library part RC0603FR-07340RL, "RC0603FR-07340RL", Manufacturer_Name=KEMET, Datasheet Link=http://www.yageo.com/documents/recent/PYu-RC0603_51_RoHS_L_v5.pdf, Height=0.55mm, Manufacturer_Part_Number=RC0603FR-07340RL
R19_0 R19_1 R19_2 R19_3 R19_4 R19_5 R19_6 R19_7: library part RC0603FR-07665RL, "RC0603FR-07665RL", Manufacturer_Name=KEMET, Mouser Part Number=603-RC0603FR-07665RL, Datasheet Link=http://www.yageo.com/documents/recent/PYu-RC0603_51_RoHS_L_v5.pdf, Height=0.55mm, Manufacturer_Part_Number=RC0603FR-07665RL, Mouser Price/Stock=https://www.mouser.com/Search/Refine.aspx?Keyword=603-RC0603FR-07665RL
R20 R21: library part CMP-2001-00582-2, "Metal Film Chip Resistor, High Reliability Type, 0.125 W, +/- 0.1%, -55 to 155 degC, 0805 (2012 Metric), RoHS, Tape and Reel", Case Code - in=0805, Case Code - mm=2012, Manufacturer=Panasonic, Operating Temperature Range=-55Cto+155C, Package / Case=0805(2012metric), Package Description="2-Pin Surface Mount Device, Body 2 x 1.25 mm", Power Rating=125mW(1/8W), Resistance=5k1, Temperature Coefficient=25PPM/C, Tolerance=0.1%, Voltage Rating=100V, Brand=Panasonic, Datasheet URL=https://industrial.panasonic.com/cdbs/www-data/pdf/RDM0000/AOA0000C307.pdf, Datasheet Version=02/2016, Factory Pack Quantity=5000, Height=0.5mm, Length=2mm, Manufacturer URL=http://www.panasonic.com/, Mounting Technology=SurfaceMount, Package Reference=0805, Packaging=Reel, Product=ThinFilmResistorsSMD, Product Category=ThinFilmResistors-SMD, RoHS=Details, Series=ERA-6A, Termination Style=SMD/SMT, Type=MetalFilmChipResistors, Width=1.25mm
R24: library part ERJ-PA3F60R4V, "ERJ-PA3F60R4V", Manufacturer_Name=Panasonic, Mouser Part Number=667-ERJ-PA3F60R4V, Arrow Part Number=ERJ-PA3F60R4V, Arrow Price/Stock=https://www.arrow.com/en/products/erj-pa3f60r4v/panasonic, Datasheet Link=https://industrial.panasonic.com/cdbs/www-data/pdf/RDO0000/AOA0000C331.pdf, Height=0.55mm, Manufacturer_Part_Number=ERJ-PA3F60R4V, Mouser Price/Stock=https://www.mouser.co.uk/ProductDetail/Panasonic/ERJ-PA3F60R4V/?qs=BzJM0faLVqVCXA%252Bk%2FOWiUA%3D%3D
S: "Connector", Manufacturer_Name="TE Connectivity", Mouser Part Number=571-6437288-1, Arrow Part Number=6437288-1, Arrow Price/Stock=https://www.arrow.com/en/products/6437288-1/te-connectivity?region=nac, Datasheet Link=https://www.te.com/commerce/DocumentDelivery/DDEController?Action=srchrtrv&DocNm=1-1773950-7&DocType=Data%20Sheet&DocLang=English&PartCntxt=6437288-1&DocFormat=pdf, Manufacturer_Part_Number=6437288-1, Mouser Price/Stock=https://www.mouser.co.uk/ProductDetail/TE-Connectivity/6437288-1?qs=WBj8811fzwGYtKR8aBSJZw%3D%3D
S1: "Switch", Manufacturer_Name="C & K COMPONENTS", Mouser Part Number=611-SDA01H1SBD, Arrow Part Number=SDA01H1SBD, Arrow Price/Stock=https://www.arrow.com/en/products/sda01h1sbd/ck?region=europe, Datasheet Link=https://www.ckswitches.com/media/1327/sda.pdf, Height=5.45mm, Manufacturer_Part_Number=SDA01H1SBD, Mouser Price/Stock=https://www.mouser.co.uk/ProductDetail/CK/SDA01H1SBD?qs=Z4wLSx0Y7o7zSPcYp0HxbA%3D%3D
TVS1: library part CMP-2000-05285-1, "Ultra Low Capacitance Double Rail-to-Rail ESD Protection Diode, 5.5 V, 1 pF, -40 to 85 degC, 4-Pin SOT143B, RoHS, Tape and Reel", Capacitance Value=16pF, ESD Protection Voltage=8KV@ContactDisc, Leakage Current=0.1uA, Manufacturer="NXP Semiconductors", Operating Temp Range=-40Cto85C, Operating Temperature Classification=Industrial, Operating Temperature Max Deg. C=85C, Operating Temperature Min Deg. C=-40C, Package / Case=SOT, Reverse Breakdown Voltage=6V, Reverse Stand-off Voltage=5.5V, Configuration=Quad, Datasheet URL=https://datasheet.ciiva.com/4479/prtr5v0u2x-102853-4479461.pdf, Datasheet Version="Rev. 02, 01/2008", Direction Type=Uni-Directional, Leakage Current (Max)=0.1uA, Manufacturer URL=http://www.nxp.com/, Mounting=SurfaceMount, Mounting Style=SurfaceMount, Number of Elements=1, Package Type=SOT, Packaging=TapeandReel, Pin Count=3+Tab, Polarity=Uni-Directional, Product Depth (mm)=1.4mm, Product Height (mm)=1mm, Product Length (mm)=3mm, Rad Hardened=No, Suppressor Type=DiodeArrays, Working Voltage=5.5V, Working Voltage (Max)=5.5V
U1: library part CMP-0243-00093-2, "ARM Cortex-M4 32-bit MCU+FPU, 210 DMIPS, 1024 kB Flash, 192 kB Internal RAM, 51 I/Os, 64-pin LQFP, -40 to 105 degC, Tray", I/Os (High Current)=51, Manufacturer=STMicroelectronics, Operating Frequency(F) (Processor speed) (MHz)=168, Supply Voltage(Vcc) max (V)=3.6, Supply Voltage(Vcc) min (V)=1.8, ComponentLink1Description="Manufacturer URL", ComponentLink1URL=http://www.st.com/web/en/home.html, ComponentLink2Description=Datasheet, ComponentLink2URL=http://www.st.com/st-web-ui/static/active/en/resource/technical/document/datasheet/DM00037051.pdf, ComponentLink3Description="Package Specification", ComponentLink3URL=http://www.st.com/st-web-ui/static/active/en/resource/technical/document/datasheet/DM00037051.pdf, Core="ARM Cortex-M4", D/A Converter=2x12-bit, DatasheetVersion="Rev. 4", FLASH Size (Prog) (kB)=1024, Internal RAM Size (kB)=192, Mounting Technology="Surface Mount", PackageDescription="64-Pin Low Profile Quad Flat Package, 10 x 10 mm Body, 0.5 mm Pitch", PackageReference=LQFP64, PackageVersion="Rev. 4, 06/2013", Packing=Tray, PartNumber=STM32F405RGT7
U2: library part CMP-0474-00861-1, "UV, OV and Reverse Supply Protection Controller, 2.5 to 34 V Vin, 8-pin SOT23 (TS8-8), -40 to 85 degC, Pb-Free, Mini Tape and Reel", Extended Temp="C, I, H", Manufacturer="Linear Technology", Power Good=no, Active Limiting=no, Circuit Breakers(#)=1, Code_JEDEC=MO-193, ComponentLink1Description="Manufacturer URL", ComponentLink1URL=http://www.linear.com/, ComponentLink2Description=Datasheet, ComponentLink2URL=http://cds.linear.com/docs/en/datasheet/4365f.pdf, ComponentLink3Description="Package Specification", ComponentLink3URL=http://cds.linear.com/docs/en/packaging/SOT_8_05-08-1637.pdf, Fast Comparator=no, Fault=yes, Foldback=no, Mounting Technology="Surface Mount", PackageDescription="8-Pin Plastic TSOT-23, Body 2.9 x 1.63 mm, Pitch 0.65 mm", PackageReference=TS8-8, PackageVersion="Rev. A, 08/2010", Packing="Mini Tape and Reel", PartNumber=LTC4365ITS8#TRMPBF, Reset=no, RoHS=TRUE, Vin Range="2.5 to 34 V"
X1: library part CMP-2000-05033-1, "AA-8.000MALV-T", Case Height=1.3mm, Case Length=5mm, Case Width=3.2mm, Frequency=8MHz, Frequency Stability=30PPM, Load Capacitance=18pF, Manufacturer=ABRACON, Operating Temperature Range=-40Cto+85C, Package / Case=5mmx3.2mm, Package Description="2-Pin Surface Mount Device, Body 5 x 3.2 mm", Package Reference=ABM3-2, Tolerance=20PPM, Brand=ABRACON, Datasheet URL=http://www.farnell.com/datasheets/1754353.pdf, Datasheet Version=Sep-13, Dimensions=3.2mmWx5mmLx1.3mmH, ESR=140Ohms, Factory Pack Quantity=1000, Manufacturer URL=http://www.abracon.com/, Mounting Style=SMD/SMT, Package URL=http://www.abracon.com/Support/PackageDrawing/Resonators/ABM3.PDF, Packaging=Reel, Product Category=Crystals, RoHS=Details, Series=ABM3, Termination Style=SMD/SMT, Type=MiniatureCeramicCrystal

## Free pads (board coordinates)
  round 196.85 hole 125.98: 8(725,175) 8(2725,175) 8(2725,1725)
  round 60 smd far side: 9(295,515) 9(1750,325) 9(1750,450) 9(1750,575) 9(1750,700) 9(1750,825) 9(1750,950) 9(1750,1075) 9(1750,1200) 9(2020,330)
  round 60 smd: 9(1275,125) 9(1275,225) 9(1630,1350) 9(1685,1465)

## Via types
v1: diameter 18, hole 12, Layer 1 Signal Power to Layer 4 Signal, 201 vias

## Nets (pads, with @x,y where several pads share a name; then routed paths per layer and width w, separated by ;. In a path a pad name is that pad's centre, name@x,y a point inside that pad or via, vN(x,y) a via of type N, cw(c..) or ccw(c..) an arc to the next point about the centre after c; other vN are vias at no path point)
BAT: D1.2 F1.2 S.1
CAN1_RX: IC5.4 U1.61 | length 1192.4
  Layer 4 Signal w10: IC5.4@2456.77,1375 2775,1375 2790,1360 2790,810 2727.79,747.79 2604.93,747.79 2591.3,761.42 U1.61@2518.5,761.42
CAN1_TX: IC5.1 U1.62 | length 1384.6
  Layer 4 Signal w10: IC5.1@2456.77,1525 2585,1525 2690,1420 2810,1420 2830,1400 2830,803.94 2736.06,710 2600,710 2568.27,741.73 U1.62@2518.5,741.73
CAN_N: IC5.6 R24.1 S.19 S.23 | length 7885.9
  Layer 1 Signal Power w10: S.23@748.43,772.83 627.17,772.83 575.61,824.39 547.42,824.39 505,866.81 505,1127.11 627.22,1249.33 ; S.19@748.43,1245.28 712.15,1281.55 705,1281.55 672.78,1249.33 627.22,1249.33 ; v1(2775,1475) 2840,1410 2840,370 2778.43,308.43 2669.73,308.43 2591.57,230.27 2591.57,91.57 2560,60 340,60 100,300 100,1450 150,1500 375,1500 505,1370 505,1358.55 566.13,1297.42 579.13,1297.42 627.22,1249.33
  Layer 4 Signal w10: IC5.6@2243.23,1425 2242.5,1425.73 2160.73,1425.73 R24.1@2160,1426.46 2155.08,1426.46 2129.28,1452.25 2129.28,1501.72 2238.21,1610.65 2550.26,1610.65 2617.91,1543 2790.94,1543 2824,1509.94 2824,1490.06 2808.94,1475 v1(2775,1475)
CAN_P: IC5.7 R24.2 S.18 S.22 | length 8059.5
  Layer 1 Signal Power w10: S.22@748.43,890.94 615.94,890.94 569.39,844.39 555.71,844.39 525,875.1 525,1100 561.22,1136.22 566.22,1131.22 672.78,1131.22 723.73,1182.17 763.1,1182.17 803.43,1222.49 803.43,1268.06 761.82,1309.66 761.82,1349.99 S.18@748.43,1363.39 712.15,1327.11 705,1327.11 672.78,1359.33 627.22,1359.33 584.72,1316.83 575,1316.83 525,1366.83 525,1378.28 383.28,1520 141.72,1520 80,1458.28 80,291.72 331.72,40 2568.28,40 2611.57,83.29 2611.57,221.98 2678.02,288.43 2786.71,288.43 2860,361.72 2860,1440 v1(2800,1500)
  Layer 4 Signal w10: IC5.7@2243.23,1475 2173.46,1475 2164.92,1483.54 R24.2@2160,1483.54 2160.48,1484.02 2160.48,1505.48 2247.65,1592.65 2542.8,1592.65 2610.46,1525 2775,1525 v1(2800,1500)
CH0_A+5V: F2.2 S.27 | length 218.9
  Layer 4 Signal w10: F2.2@503.54,1450 525,1450 580.8,1394.2 580.8,1373.53 S.27@650,1304.33
CH0_IN: D3_0.2 R18_0.2 S.2 | length 441.6
  Layer 4 Signal w10: S.2@964.96,1304.33 970.67,1304.33 1075,1200 D3_0.2@1129.25,1200 1171.36,1200 1195.36,1176 1284.94,1176 1308.94,1200 R18_0.2@1343.5,1200
CH0_IN_FLT: C22_0.2 pad.9@1750,1200 R18_0.1 R19_0.2 U1.26 | length 855.6
  Layer 4 Signal w10: R18_0.1@1406.5,1200 R19_0.2@1493.5,1200 1493.5,1198.03 1524.22,1167.31 1670.46,1167.31 C22_0.2@1700.98,1197.83 ; C22_0.2@1700.98,1200 C22_0.2@1700.98,1202.17 ; pad.9@1750,1200 1795,1200 1855,1140 1855,1025 2000.47,879.53 U1.26@2081.5,879.53
CH1_A+5V: F3.2 S.28 | length 218.6
  Layer 4 Signal w10: F3.2@503.54,1325 525,1325 550,1300 550,1275 638.78,1186.22 S.28@650,1186.22